# Allegro board ex2_rlc.brd
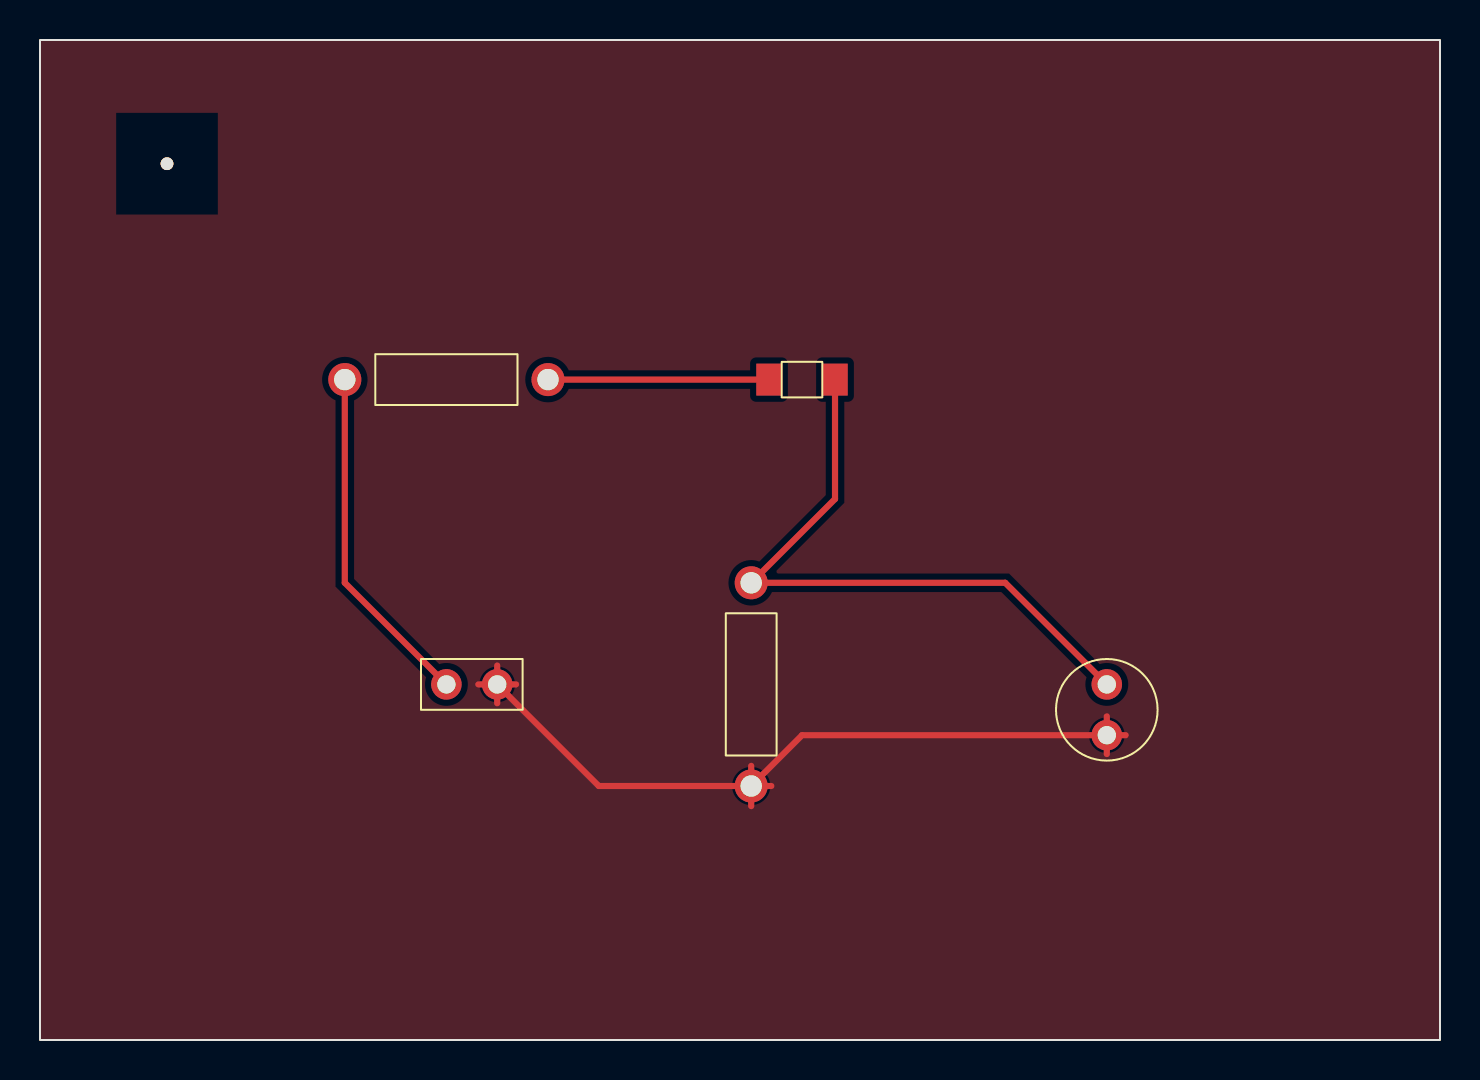
[diagram p0: board, top side]
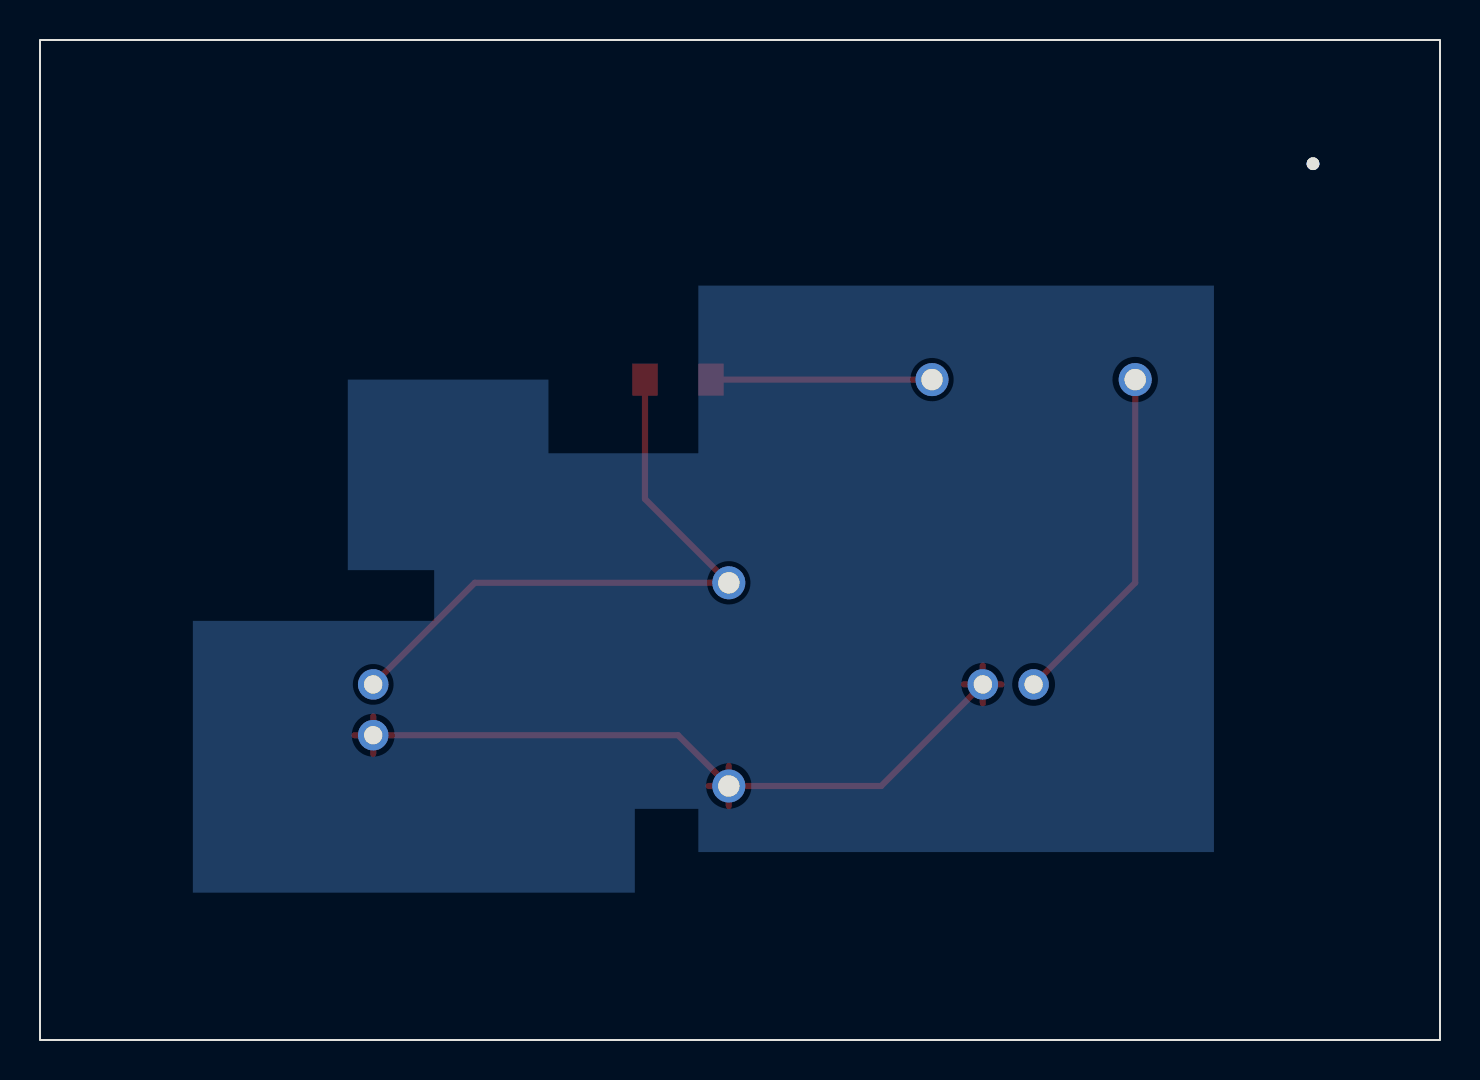
[diagram p1: board, bottom side, seen from below]

Outline 70 x 50 mm; copper layers: TOP, BOTTOM. Coordinates in mm from the lower left corner of the outline.
Outline path: rectangle 0,0 70,50

## Design rules (mm)
constraint set DEFAULT: min track width 0.254
net group BASENTS: nets KKK N00105
net group POWERNETS: nets VCC

## Placement (name value [footprint] x y rotation side)
C1  1u  [CAP196]  53.34 17.78 180 top
J1  CON2  [JUMPER2]  20.32 17.78 0 top
L1  100n  [SMDRES]  38.1 33.02 0 top
NOREF  -  [unnamed]  6.35 43.81 0 top
R1  330  [RES400]  15.24 33.02 270 top
R2  330  [RES400]  35.56 22.86 180 top

## Library data of the parts
C1 = CAP NP: Tolerance: ***; User Part Number: ***
J1 = CON2: User Part Number: ***
L1 = INDUCTOR: Tolerance: ***; User Part Number: ***
R1 R2 = R: Tolerance: ***; User Part Number: ***

## Footprints (pads in the part's own frame, mm; a bottom-side part is the same pattern mirrored in y, then rotated)
CAP196
  round 1.524 hole 0.914: 1(0,0) 2(0,2.54)
JUMPER2
  round 1.524 hole 0.914: 1(0,0) 2(2.54,0)
RES400
  round 1.651 hole 1.067: 1(0,0) 2(0,10.16)
SMDRES
  rect 1.27x1.6 smd: 1(-1.651,0) 2(1.651,0)
unnamed
  round 0.635 hole 3.175 unplated: (0,0)

## Nets
GND: C1.2 J1.2 R2.2
VCC: J1.1 R1.1
KKK: L1.1 R1.2
N00105: C1.1 L1.2 R2.1

## Routing (per net, layer and track width the routed paths; a pad name or vN(x,y) marks a point on that pad's centre or on a via; arc(x,y) is an arc through that point)
GND: length 43.2
  TOP w0.308: 53.34,14.3 C1.2 ; C1.2 54.28,15.24 ; C1.2 38.1,15.24 R2.2 ; C1.2 53.34,16.18 ; R2.2 35.56,13.71 ; R2.2 27.94,12.7 J1.2 ; R2.2 36.57,12.7 ; R2.2 35.56,11.69 ; 22.86,16.84 J1.2 ; J1.2 22.86,18.72 ; J1.2 21.92,17.78 ; J1.2 23.8,17.78
VCC: length 17.3
  TOP w0.308: J1.1 15.24,22.86 R1.1
KKK: length 11
  TOP w0.308: R1.2 L1.1
N00105: length 31.8
  TOP w0.308: C1.1 48.26,22.86 R2.1 39.75,27.05 L1.2

## Copper pours and planes (outline as drawn; the poured copper is in the pictures)
GND on TOP: 0,0 0,50 70,50 70,0
Net_3 on BOTTOM: 11.3,37.72 37.08,37.72 37.08,29.34 44.58,29.34 44.58,33.02 54.61,33.02 54.61,23.5 50.29,23.5 50.29,20.95 62.36,20.95 62.36,7.37 40.26,7.37 40.26,11.56 37.08,11.56 37.08,9.4 11.3,9.4
